# Altium PCB EFR32xG22_ESL-Node_Ref-Des.PcbDoc (part 1 of 3)
Units mm, origin at the board's own origin, x right, y up, seen from the top; angles counter-clockwise.
Board outline 101.83 x 52.07 mm, 2 copper layers (Top, Bottom), stack 0.78 mm thick; 179 components, 91 nets, 473 pads, 1291 vias.
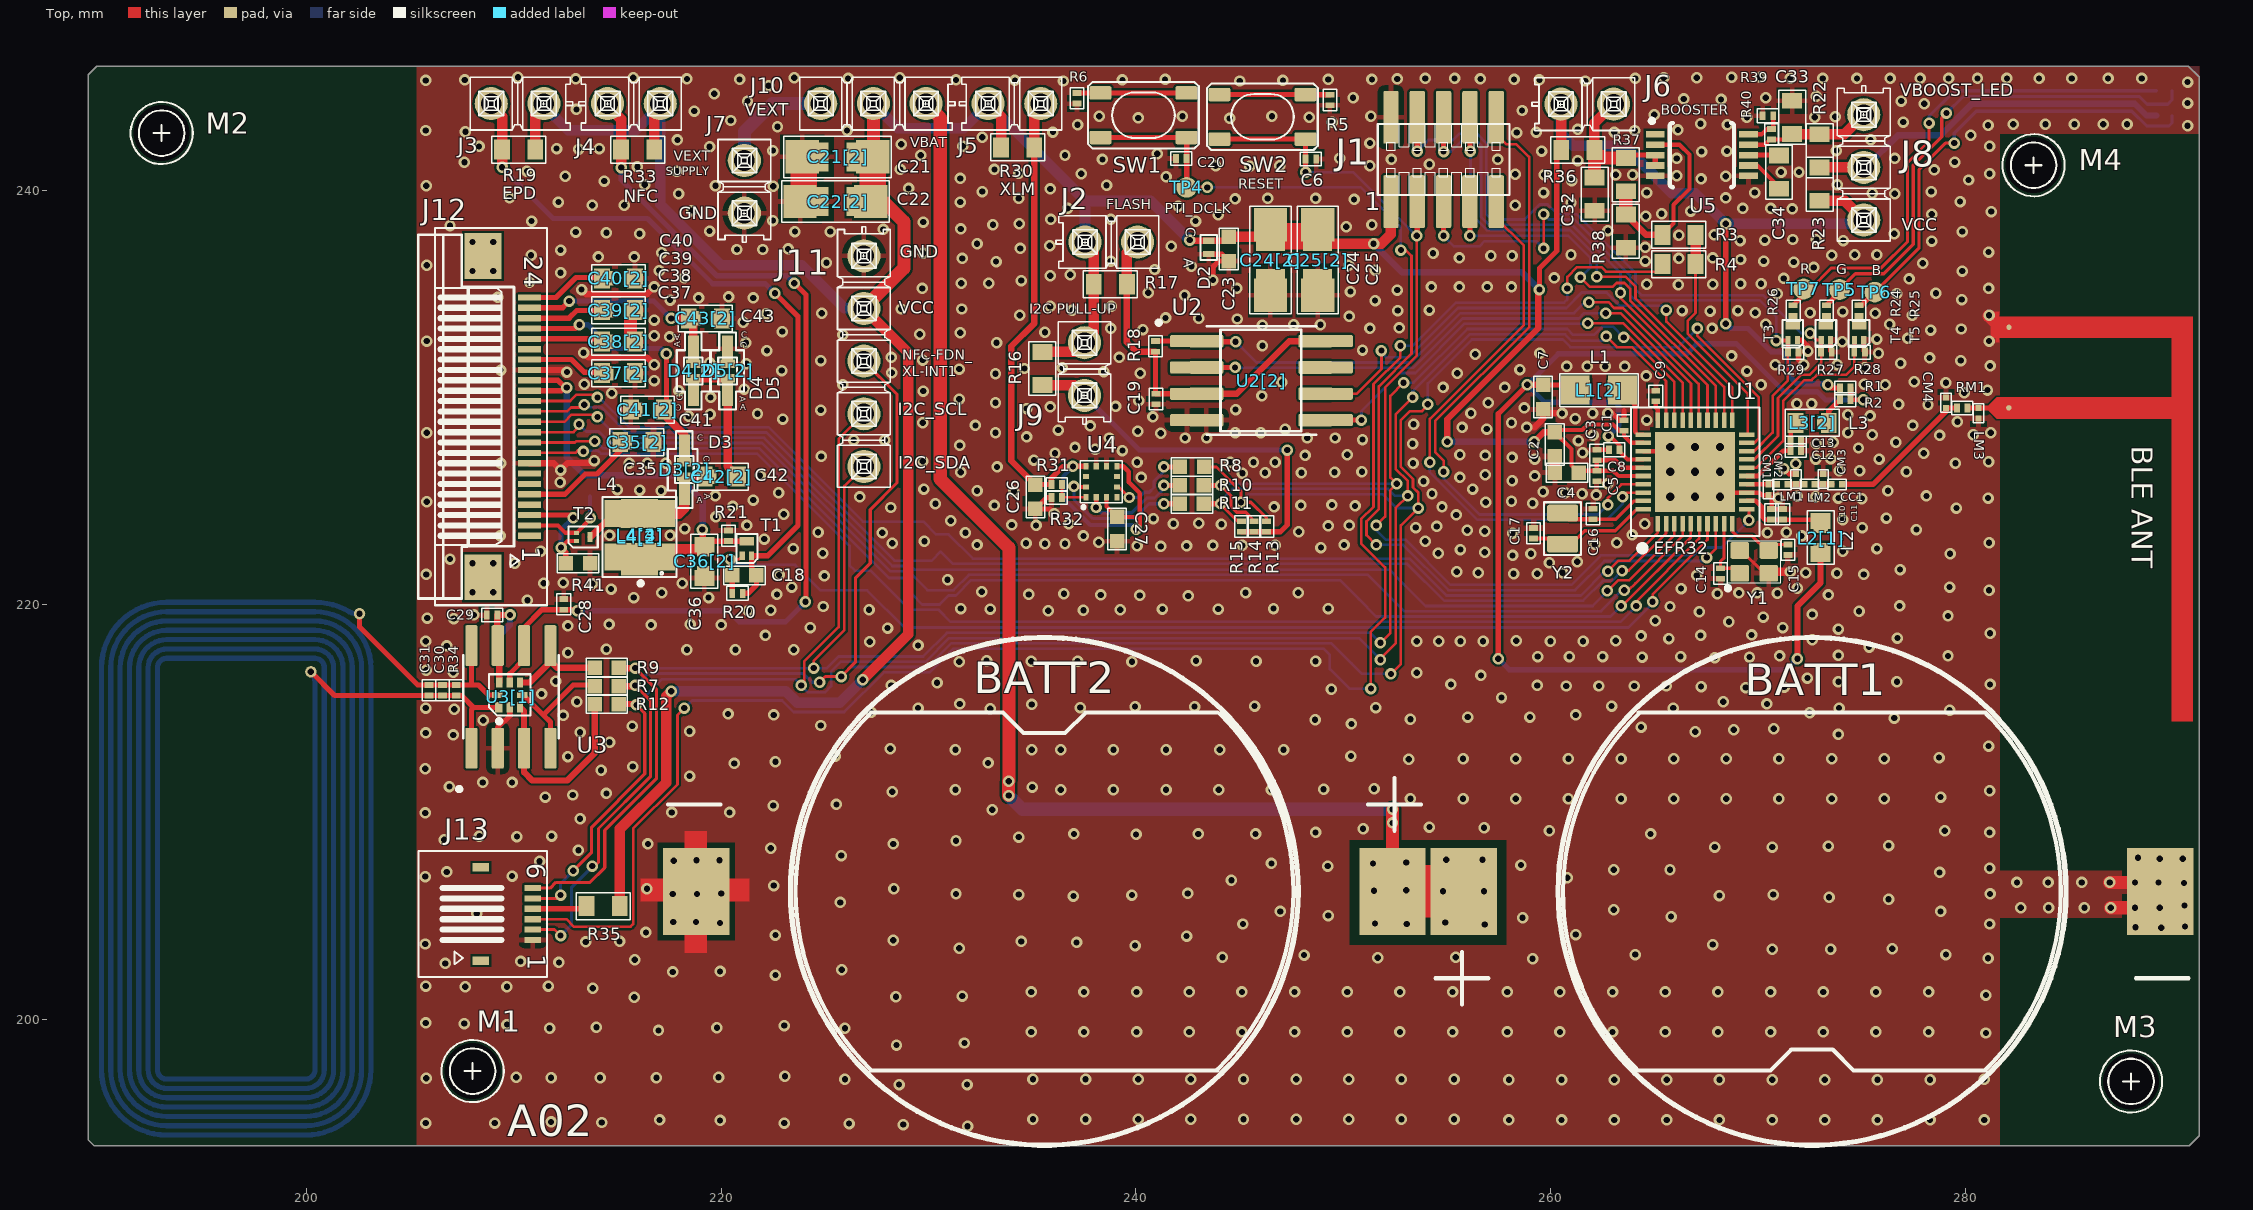
[diagram p0: Top view]
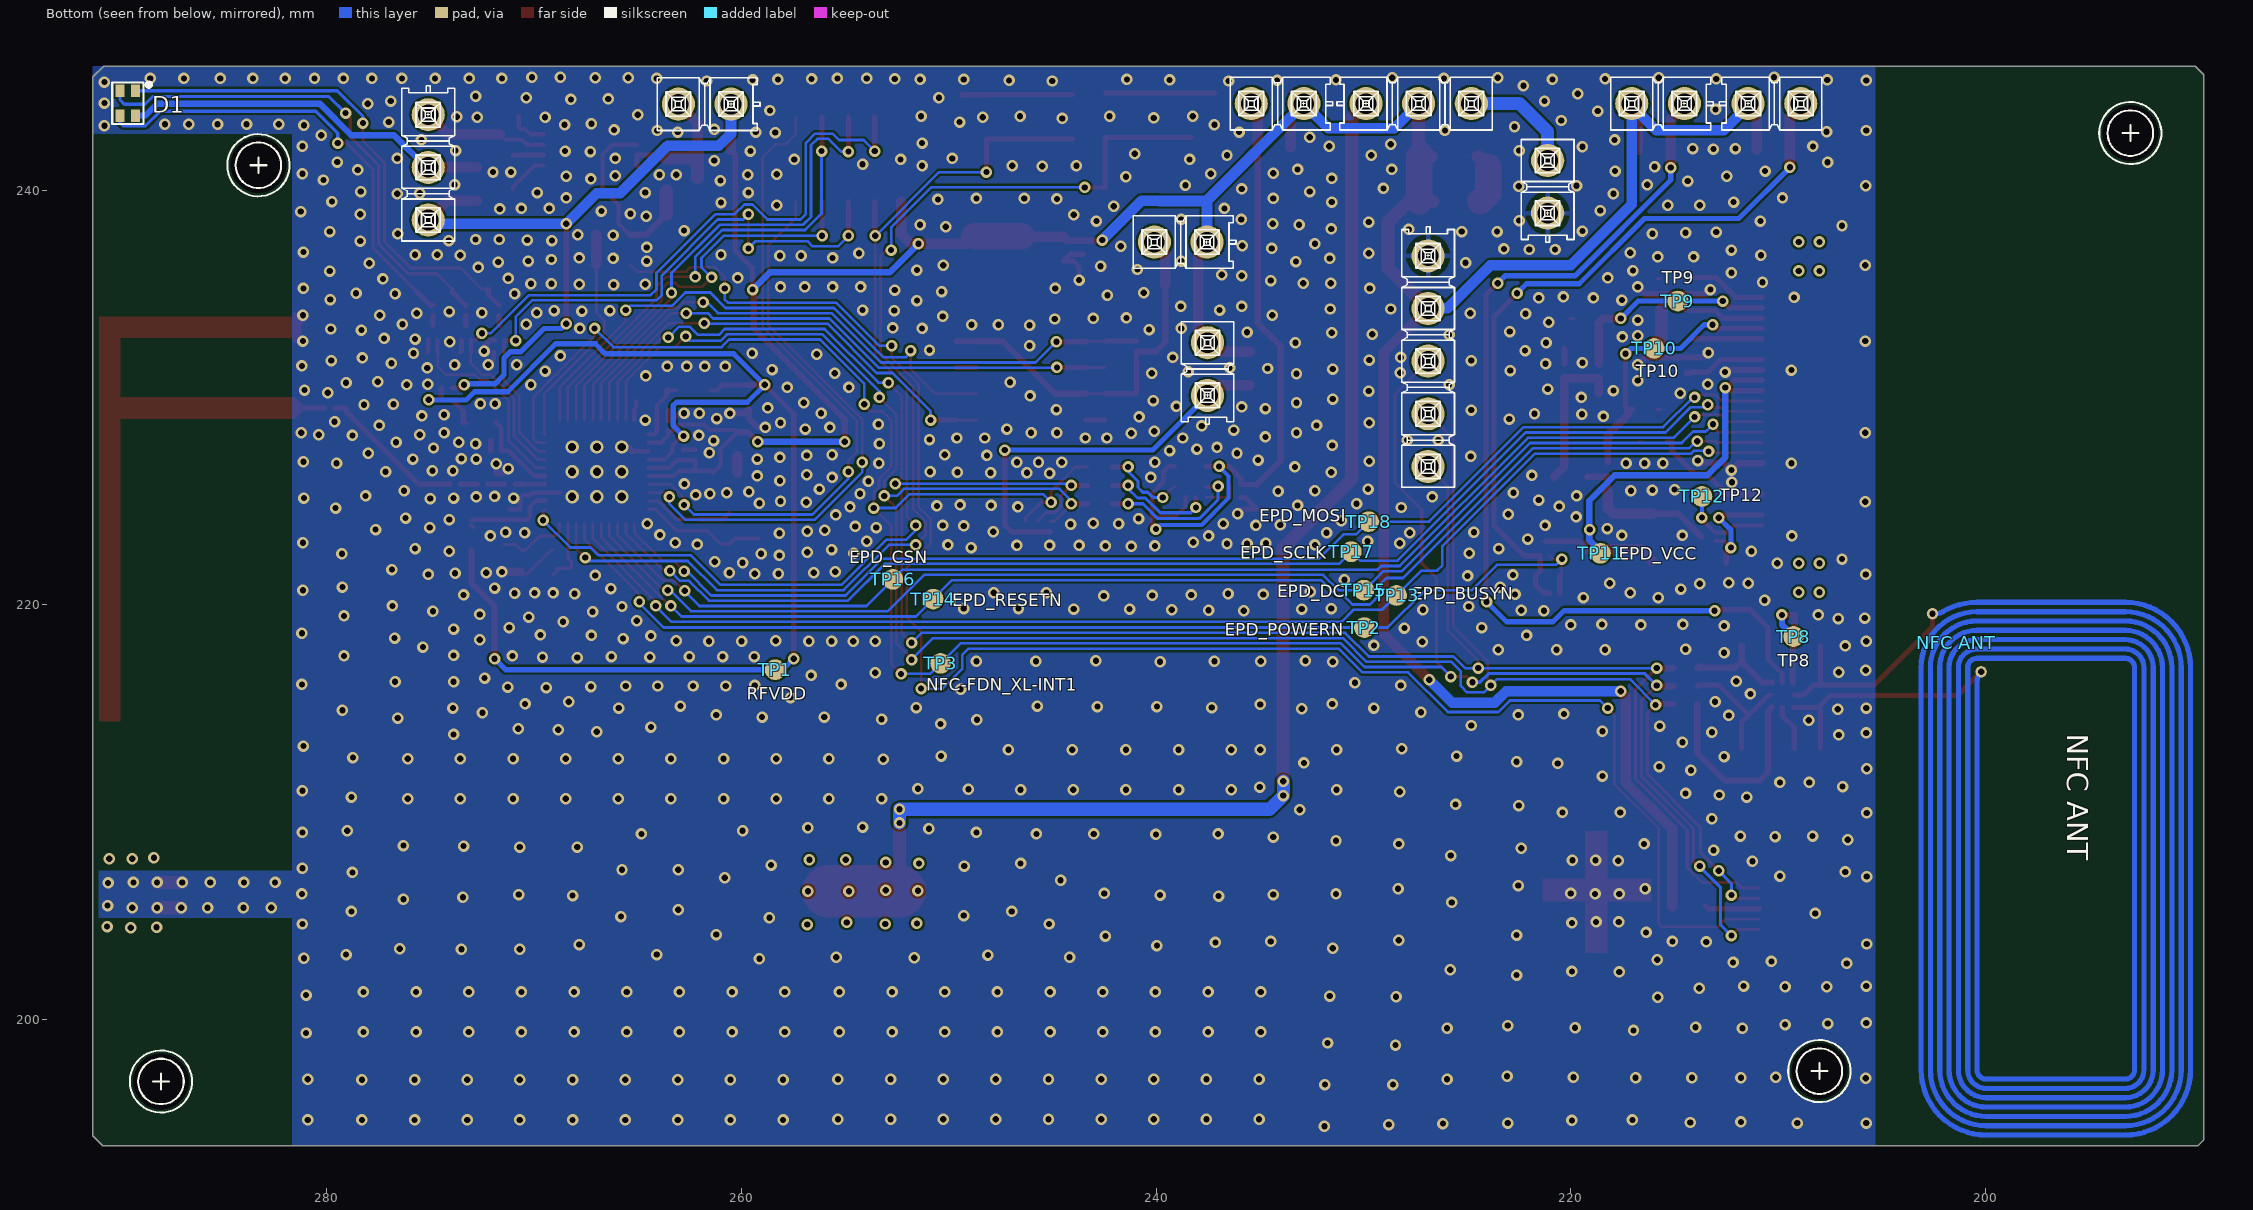
[diagram p1: Bottom view, seen from below]

## Layer stack, top to bottom
Top Solder: solder mask 0.0102, Solder Resist, Dk 3.5
Top: signal copper 0.035
Dielectric 1: core 0.71, FR-4, Dk 4.8
Bottom: signal copper 0.035
Bottom Solder: solder mask 0.0102, Solder Resist, Dk 3.5

## Board outline
189.738,193.904 189.459,194.183 189.459,245.567 189.865,245.974 290.779,245.974 291.287,245.466 291.287,194.386 290.805,193.904

## Design rules (kind name [scope] priority, off if disabled: settings)
Clearance [All] p1: gap=0.1
HoleSize HoleSize_1 [All] p1: absolutevalues=TRUE maxlimit=25.4 minlimit=0.254 maxpercent=80.000 minpercent=20.000
HoleSize [All] p2: absolutevalues=TRUE maxlimit=25.4 minlimit=0.254 maxpercent=80.000 minpercent=20.000
HoleToHoleClearance mdViaViaSameLayer [All] p1 off: gap=0.203 allowstackedmicrovias=TRUE
HoleToHoleClearance [All] p2: gap=0.254 allowstackedmicrovias=TRUE
MinimumSolderMaskSliver [All] p1 off: minsoldermaskwidth=0.254
NetAntennae [All] p1 off: netantennaetolerance=0
PasteMaskExpansion mlMinCreamFrame [All] p1 off: expansion=-0.013
PasteMaskExpansion [All] p2 off: expansion=0
PolygonConnect ThermalVias [IsVia] p1: connectstyle=Direct reliefconductorwidth=0.254 reliefentries=4 polygonreliefangle="90 Angle" airgapwidth=0.254
PolygonConnect [All] p2: connectstyle=Relief reliefconductorwidth=0.254 reliefentries=4 polygonreliefangle="90 Angle" airgapwidth=0.254
RoutingVias [All] p1: holewidth=0.711 width=1.27 viastyle="Through Hole" minholewidth=0.711 minwidth=1.27 maxholewidth=0.711 maxwidth=1.27
ShortCircuit ShortCircuit_1 [InComponent('BLE ANT') or InComponent('NFC ANT')] p1: allowed=TRUE
ShortCircuit [All] p2: allowed=FALSE
SilkToSilkClearance [All] p1 off: silktosilkclearance=0.254
SilkToSolderMaskClearance [IsPad] p1 off: minsilkscreentomaskgap=0.254 clearancetoexposedcopper=TRUE
SolderMaskExpansion mlMinStopFrame [All] p1 off: expansion=0.051
SolderMaskExpansion [All] p2 off: expansion=0.102
Width Width_1 [All] p1: maxlimit=2540 minlimit=0.127 preferedwidth=0.254
Width [All] p2: maxlimit=0.254 minlimit=0.254 preferedwidth=0.254
22 further rules are at their usual default settings.

## Classes and differential pairs
component class EFR32xG22_ESL-Node_Ref-Des_Sheet2: BATT1 BATT2 C21 C21[2] C22 C22[2] C23 C24 C24[2] C25 C25[2] C26 C27 C28 C29 C30 C31 C32 C33 C34 C35 C35[2] C36 C36[2] C37 C37[2] C38 C38[2] C39 C39[2] C40 C40[2] C41 C41[2] C42 C42[2] C43 C43[2] D1 D2 D3 D3[2] D4 D4[2] D5 D5[2] J4 J5 J6 J7 J8 J10 J12 J13 L4 L4[2] L4[3] L4[4] M1 M2 M3 M4 "NFC ANT" R22 R23 R24 R25 R26 R27 R28 R29 R30 R31 R32 R33 R34 R35 R36 R37 R38 R39 R41 T2 T3 T4 T5 TP5 TP6 TP7 TP8 TP9 TP10 TP11 TP12 TP13 TP14 TP15 TP16 TP17 TP18 U3 U3[1] U4 U5 U$18 U$19 U$22 U$23 U$60 U$61 U$62 U$63 U$65 U$66 U$68 U$70 U$71 U$74 U$75 U$77 U$78 U$98
component class EFR32xG22_ESL-Node_Ref-Des_Sheet1: "BLE ANT" C1 C2 C3 C4 C5 C6 C7 C8 C9 C10 C11 C12 C13 C14 C15 C16 C17 C18 C19 C20 CC1 CM1 CM2 CM3 CM4 J1 J2 J3 J9 J11 L1 L1[2] L2 L2[1] L3 L3[2] LM1 LM2 LM3 R1 R2 R3 R4 R5 R6 R7 R8 R9 R18 R21 R22 R23 R36 R37 R38 R39 RM1 SW1 SW2 SW? T1 TP1 TP2 TP3 TP4 TP? U1 U2 U2[2] U$84 U$85 U$89 U$92 U$94 U$95 U$99 U$101 U$109 U$110 U$111 U$112 U$113 U$114 U$115 U$116 U$117 U$119 U$120 U$121 U$123 U$124 U$126 U$128 U$129 U$130 U$131 U$132 U$133 U$134 U$135 U$136 U$138 U$146 U$242 Y1 Y2

## Components (designator, comment, footprint, x,y, rotation, side; value= is the part's Value field where it differs from the comment)
BATT1 "1052TR" BATTERY_HOLDER_CR2450_SMT_1052 272.613,206.172 r0 top
BATT2 "1052TR" BATTERY_HOLDER_CR2450_SMT_1052 235.579,206.172 r180 top
"BLE ANT" "2.4 GHz" RF_ANTENNA_INVERTED_F 282.115,229.49 r270 top (schematic designator ANT)
C1 "" 0201 263.538,228.644 r0 top
C2 "" 0402 260.198,227.736 r0 top
C3 "" 0201 262.23,227.222 r0 top
C4 "" 0402 260.782,226.365 r270 top
C5 "" 0201 262.23,226.206 r180 top
C6 "100nF" 0201 248.436,241.503 r90 top
C7 "" 0402 259.639,230.016 r0 top
C8 "" 0201 263.068,227.476 r90 top
C9 "" 0201 265.074,230.067 r180 top
C10 "15pF" 0201 270.662,224.358 r180 top
C11 "" 0201 271.196,224.358 r0 top
C12 "15pF" 0201 271.831,227.432 r270 top
C13 "" 0201 271.831,227.914 r270 top
C14 "CAP CER 0201 C0G 1.2pF 50V 0.05pF" 0201 268.199,221.507 r180 top
C15 "CAP CER 0201 C0G 1.2pF 50V 0.05pF" 0201 271.45,222.65 r180 top
C16 "CAP CER 0201 C0G 1.2pF 50V 0.05pF" 0201 262.052,224.377 r0 top
C17 "CAP CER 0201 C0G 1.2pF 50V 0.05pF" 0201 259.182,223.444 r0 top
C18 "" 0402 221.107,221.412 r90 top
C19 "100nF" 0201 240.97,229.922 r0 top
C20 "CAP CER 1000PF 10V X7R 0201 10%" 0201 242.188,241.529 r90 top
C21 "N.M." 1206 225.603,241.605 r270 top (schematic designator C21[1])
C21[2] "N.M." 0805 225.603,241.605 r270 top
C22 "N.M." 1206 225.501,239.446 r270 top (schematic designator C22[1])
C22[2] "N.M." 0805 225.603,239.446 r270 top
C23 "" 0402 244.475,237.16 r0 top
C24 "100µF" 1206 246.482,236.626 r0 top (schematic designator C24[1])
C24[2] "" 0805 246.482,236.626 r0 top
C25 "N.M." 1206 248.768,236.626 r0 top (schematic designator C25[1])
C25[2] "100µF" 0805 248.768,236.626 r0 top
C26 "100nF" 0402 235.145,225.204 r0 top
C27 "100nF" 0402 239.09,223.647 r0 top
C28 "" 0201 212.395,220.015 r180 top
C29 "" 0201 208.939,219.507 r270 top
C30 "" 0201 206.55,215.872 r180 top
C31 "CAP CER 0201 C0G 1.2pF 50V 0.05pF" 0201 205.889,215.872 r180 top
C32 "10µF" 0603 262.128,239.801 r0 top
C33 "10µF" 0603 271.653,243.51 r180 top
C34 "0.33uF" 0603 271.018,240.868 r0 top
C35 "1µF" 0603 215.925,227.838 r270 top (schematic designator C35[1])
C35[2] "" 0402 215.925,227.838 r270 top
C36 "10µF" 0603 219.175,222.09 r180 top (schematic designator C36[1])
C36[2] "" 0402 219.175,222.09 r180 top
C37 "" 0603 215.036,231.165 r270 top (schematic designator C37[1])
C37[2] "1µF" 0402 215.036,231.165 r270 top
C38 "1µF" 0603 215.036,232.689 r270 top (schematic designator C38[1])
C38[2] "" 0402 215.036,232.689 r270 top
C39 "1µF" 0603 215.036,234.213 r270 top (schematic designator C39[1])
C39[2] "" 0402 215.036,234.213 r270 top
C40 "1µF" 0603 215.036,235.737 r270 top (schematic designator C40[1])
C40[2] "" 0402 215.036,235.737 r270 top
C41 "1µF" 0603 216.433,229.413 r90 top (schematic designator C41[1])
C41[2] "" 0402 216.433,229.413 r90 top
C42 "4.7µF" 0603 219.994,226.176 r90 top (schematic designator C42[1])
C42[2] "" 0402 219.994,226.176 r90 top
C43 "1µF" 0603 219.227,233.807 r270 top (schematic designator C43[1])
C43[2] "" 0402 219.227,233.807 r270 top
CC1 "CAP CER 0201 NP0 18pF 25V 2%" 0201_300ER 273.812,225.806 r270 top
CM1 "CAP CER 0201 C0G 1.2pF 50V 0.05pF" 0201_300ER 270.51,225.552 r180 top
CM2 "" 0201_300ER 271.831,226.06 r0 top
CM3 "N.M." 0201_300ER 273.152,226.06 r0 top
CM4 "N.M." 0201_300ER 279.07,229.743 r0 top
D1 "ASCB-JTC2-0A308" LED_RGB_PLCC-4 289.6,244.196 r90 bottom
D2 "" SOD882_NXP 243.51,237.236 r270 top
D3 "PMEG3005ELD" SOD-323 218.211,226.517 r0 top (schematic designator D3[1])
D3[2] "" SOD882_FIXED 218.211,226.517 r270 top
D4 "PMEG3005ELD" SOD-323 218.648,231.276 r180 top (schematic designator D4[1])
D4[2] "" SOD882_FIXED 218.648,231.276 r90 top
D5 "PMEG3005ELD" SOD-323 220.299,231.276 r0 top (schematic designator D5[1])
D5[2] "" SOD882_FIXED 220.299,231.276 r270 top
J1 "FTSH-105-01-L-DV-K-TR" FTSH_105_01_L_DV_K 254.838,241.478 r0 top
J2 "75160-101-02LF" Jumper_HDR_2.54mm 237.541,237.49 r0 top
J3 "75160-101-02LF" Jumper_HDR_2.54mm 211.437,244.17 r180 top
J4 "75160-101-02LF" Jumper_HDR_2.54mm 214.511,244.17 r0 top
J5 "75160-101-02LF" Jumper_HDR_2.54mm 232.867,244.17 r0 top
J6 "75160-101-02LF" Jumper_HDR_2.54mm 260.502,244.145 r0 top
J7 "75160-101-02LF" Jumper_HDR_2.54mm 221.107,238.887 r90 top
J8 "75160-101-03LF" Jumper_HDR_2.54mm_3p 275.107,243.637 r270 top
J9 "75160-101-02LF" Jumper_HDR_2.54mm 237.515,230.099 r90 top
J10 "75160-101-03LF" Jumper_HDR_2.54mm_3p 229.87,244.17 r180 top
J11 "MTSW-105-06-S-S-023" Jumper_HDR_2.54mm_5p 226.873,236.83 r270 top
J12 "FH34SRJ-24S-0.5SH" FPC_CONNECTOR_24_0.5MM_PITCH_BOTTOM_CONTACT_ACES_1.3MM_50530 210.396,229.073 r270 top
J13 "FH34SRJ-6S-0.5SH" FH34SRJ-6S-0.5SH 210.499,205.08 r270 top
L1 "2.2µH" 0805 262.331,230.346 r90 top (schematic designator L1[1])
L1[2] "2.2µH" 0603 262.331,230.346 r90 top
L2 "1000Ω @ 100MHz" 0603 273.025,223.241 r0 top (schematic designator L2[2])
L2[1] "1000Ω @ 100MHz" 0402 273.025,223.215 r0 top
L3 "1000Ω @ 100MHz" 0402 272.618,228.771 r90 top (schematic designator L3[1])
L3[2] "1000Ω @ 100MHz" 0603 272.618,228.771 r90 top
L4 "10µH" 0805 216.052,223.249 r0 top (schematic designator L4[1])
L4[2] "10µH" 0806 216.052,223.249 r0 top
L4[3] "10µH" 2520 216.052,223.342 r180 top
L4[4] "10µH" WE-MAPI-3015 216.052,223.342 r90 top
LM1 "" 0201_300ER 271.17,225.806 r270 top
LM2 "IND Fixed 0201 1.5nH 1A 50mOhm 0.05nH" 0201_300ER 272.492,225.806 r270 top
LM3 "" 0201_300ER 280.645,229.235 r0 top
M1 "HOLE_2.2_NPL" HOLE_2.2_NPL 208,197.5 r0 top locked
M2 "HOLE_2.2_NPL" HOLE_2.2_NPL 193,242.75 r0 top locked
M3 "HOLE_2.2_NPL" HOLE_2.2_NPL 288,197 r0 top locked
M4 "HOLE_2.2_NPL" HOLE_2.2_NPL 283.3,241.2 r0 top locked
"NFC ANT" "NFC CUSTOM PCB ANT" NFC_27X14.3_7W_WIDTH0.25MM_SPACE0.2MM_1.5UH_V1_0_NOVIASTOP 196.596,207.264 r180 bottom
R1 "" 0201 274.218,230.454 r90 top
R2 "" 0201 274.218,229.889 r90 top
R3 "0R" 0603 266.192,237.846 r270 top
R4 "N.M." 0603 266.192,236.423 r90 top
R5 "RES 0201 100R 1/20W 1% 200ppm" 0201 249.352,244.348 r180 top
R6 "RES 0201 100R 1/20W 1% 200ppm" 0201 237.16,244.425 r180 top
R7 "0R" 0402 214.47,216.07 r90 top
R8 "0R" 0402 242.697,226.644 r270 top
R9 "0R" 0402 214.47,216.959 r90 top
R10 "0R" 0402 242.696,225.755 r90 top
R11 "0R" 0402 242.696,224.866 r90 top
R12 "0R" 0402 214.47,215.206 r90 top
R13 "" 0201 246.304,223.774 r180 top
R14 "" 0201 245.694,223.774 r180 top
R15 "" 0201 245.085,223.774 r180 top
R16 "0R" 0603 235.483,231.394 r0 top
R17 "0R" 0603 238.76,235.458 r90 top
R18 "RES 0201 330K 1/20W 1%" 0201 240.944,232.461 r180 top
R19 "0R" 0603 210.218,241.953 r270 top
R20 "100k" 0201 220.777,220.548 r270 top
R21 "" 0201 220.347,223.322 r180 top
R22 "N.M." 0603 272.974,241.897 r0 top
R23 "N.M." 0603 272.974,240.284 r180 top
R24 "" 0201 273.304,234.188 r0 top
R25 "" 0201 274.879,234.188 r0 top
R26 "" 0201 271.704,234.188 r0 top
R27 "" 0201 273.304,232.181 r90 top
R28 "" 0201 274.905,232.181 r90 top
R29 "" 0201 271.704,232.181 r90 top
R30 "0R" 0603 234.29,242.062 r90 top
R31 "RES 0201 0R" 0201 236.173,225.802 r270 top
R32 "RES 0201 0R" 0201 236.173,225.167 r270 top
R33 "0R" 0603 215.958,241.953 r270 top
R34 "RES 0201 0R" 0201 207.21,215.872 r180 top
R35 "0 R" 0603 214.3,205.461 r270 top
R36 "0R" 0603 261.315,241.935 r90 top
R37 "N.M." 0603 263.627,240.741 r0 top
R38 "N.M." 0603 263.627,238.023 r0 top
R39 "RES 0201 0R" 0201 270.485,243.586 r270 top
R40 "RES 0201 0R" 0201 270.662,242.697 r180 top
R41 "" 0402 213.081,221.996 r270 top
RM1 "0R" 0201 279.858,229.489 r270 top
SW1 "PTS810SJM250SMTRLFS" SW_CK_PTS810 240.36,243.611 r180 top
SW2 "PTS810SJM250SMTRLFS" SW_CK_PTS810 246.101,243.535 r180 top
T1 "" SOT883_B_FIXED 221.234,222.707 r90 top
T2 "" SOT8026 213.335,223.266 r0 top
T3 "" SOT883_B_FIXED 271.682,233.116 r90 top
T4 "" SOT883_B_FIXED 273.279,233.121 r90 top
T5 "" SOT883_B_FIXED 274.879,233.121 r90 top
TP1 "TPSMDR1" TP_RPAD1#1 258.369,216.865 r180 bottom
TP2 "TPSMDR1" TP_RPAD1#1 229.946,218.897 r180 bottom
TP3 "TPSMDR1" TP_RPAD1#2 250.393,216.51 r180 bottom
TP4 "TPSMDR1" TP_RPAD1#1 242.443,240.132 r90 top
TP5 "TPSMDR1" TP_RPAD1#3 273.939,235.255 r0 top
TP6 "TPSMDR1" TP_RPAD1#4 275.641,234.976 r0 top
TP7 "TPSMDR1" TP_RPAD1#1 272.212,235.229 r0 top
TP8 "TPSMDR1" TP_RPAD1#5 209.245,217.399 r180 bottom
TP9 "TPSMDR1" TP_RPAD1#1 214.828,234.647 r180 bottom
TP10 "TPSMDR1" TP_RPAD1#1 215.971,232.361 r90 bottom
TP11 "TPSMDR1" TP_RPAD1#1 218.562,222.48 r180 bottom
TP12 "TPSMDR1" TP_RPAD1#1 213.665,225.222 r180 bottom
TP13 "TPSMDR1" TP_RPAD1#1 228.397,220.447 r180 bottom
TP14 "TPSMDR1" TP_RPAD1#1 250.749,220.269 r180 bottom
TP15 "TPSMDR1" TP_RPAD1#1 229.972,220.701 r90 bottom
TP16 "TPSMDR1" TP_RPAD1#1 252.692,221.221 r180 bottom
TP17 "TPSMDR1" TP_RPAD1#1 230.581,222.555 r180 bottom
TP18 "TPSMDR1" TP_RPAD1#1 229.743,224.003 r180 bottom
U1 "EFR32XG22" QFN-40_EFR32 266.97,226.407 r90 top
U2 "MX25R8035FZUIL0" SOP8_127P600X175-8N_150MIL 246.024,230.81 r0 top (schematic designator U2[1])
U2[2] "MX25R8035FZUIL0" SOP8_127P790X216-8N_200MIL 246.05,230.81 r0 top
U3 "NT3H2111W0FHKH" XQFN-8 209.788,215.646 r90 top (schematic designator U3[2])
U3[1] "NT3H2111W0FHKH" SO8_SOIC127P600X175-8N 209.847,215.551 r90 top
U4 "BMA400" BMA400 238.332,225.929 r0 top
U5 "MAX1759" UMAX10 267.299,241.689 r270 top
Y1 "DSX211SH 1ZZNAE38400AB0A" XTAL_DSX211SH_4 269.824,222.066 r0 top
Y2 "CM8V-T1A-32.768KHZ-7PF-20PPM-TA-QC" XTAL_DST1610A 260.579,223.672 r270 top

## Footprints (in the part's own frame and the unit in brackets; to place one, negate y for a bottom-side part, rotate by r counter-clockwise, add the part's x,y. Pads: shape width x height; smd on the part's side, far side on the other; paste and mask are expansions set on the pad)
0201 [mm] "0201"
  rect 0.43x0.28 smd: 1(0,-0.255) 2(0,0.255)
  silkscreen extent -0.33,-0.51 0.33,0.51
0201_300ER [mm] "0201_300ER"
  rect 0.3x0.3 smd: 1(0,-0.255) 2(0,0.255)
  silkscreen extent -0.25,-0.45 0.25,0.45
0402 [mm] "0402"
  rect 0.7x0.7 smd: 1(0,-0.585) 2(0,0.585)
  silkscreen extent -0.45,-1 0.45,1
0603 [mil] "0603"
  rect 38x30 smd: 1(0,-31.5) 2(0,31.5)
  silkscreen extent -26,-51 26,51
0805 [mil] "0805"
  rect 55.12x55.12 smd: 1(0,-45) 2(0,45)
0806 [mil] "0806"
  rect 70.87x55.12 smd: 1(0,-45) 2(0,45)
1206 [mil] "1206"
  rect 62.99x62.99 smd: 1(0,-67) 2(0,67)
  silkscreen extent -39,-102 39,102
2520 [mm] "2520"
  rect 2x0.85 smd: 1(0,0.8) 2(0,-0.8)
  silkscreen extent -1.13,1.77 -1,1.89
BATTERY_HOLDER_CR2450_SMT_1052 [mm] "CR2450 Battery Holder"
  rect 3.2x4.2 smd: 1(-16.795,0) 2(16.795,0)
  silkscreen extent -18.16,-12.25 18.16,12.25, body extent -13.46,-8 13.46,7.97, height 4.8
BMA400 [mm]
  rect 0.25x0.3 smd paste+0 mask+0: 1(-0.75,-0.75) 2(-0.25,-0.75) 3(0.25,-0.75) 4(0.75,-0.75) 7(0.75,0.75) 8(0.25,0.75) 9(-0.25,0.75) 10(-0.75,0.75)
  rect 0.3x0.25 smd paste+0 mask+0: 5(0.75,-0.25) 6(0.75,0.25) 11(-0.75,0.25) 12(-0.75,-0.25)
  silkscreen extent -1.02,-1.27 1.02,1.02
FH34SRJ-6S-0.5SH [mm] "Touch Interface Connector, 0.5mm pitch, 6 pins"
  rrect1% 0.3x0.8 smd: 1(1.25,0.4) 2(0.75,0.4) 3(0.25,0.4) 4(-0.25,0.4) 5(-0.75,0.4) 6(-1.25,0.4)
  rect 0.4x0.8 smd: P$5(-2.25,-2.1) P$6(2.25,-2.1)
  silkscreen extent -3.05,-5.12 3.05,1.09
FPC_CONNECTOR_24_0.5MM_PITCH_BOTTOM_CONTACT_ACES_1.3MM_50530 [mm] "FPC_CONNECTOR_24_0.5MM_PITCH_BOTTOM_CONTACT_ACES_1.3MM_50530"
  rrect1% 0.3x1.1 smd: 1(5.75,0.35) 2(5.25,0.35) 3(4.75,0.35) 4(4.25,0.35) 5(3.75,0.35) 6(3.25,0.35) 7(2.75,0.35) 8(2.25,0.35) 9(1.75,0.35) 10(1.25,0.35) 11(0.75,0.35) 12(0.25,0.35) 13(-0.25,0.35) 14(-0.75,0.35) 15(-1.25,0.35) 16(-1.75,0.35) 17(-2.25,0.35) 18(-2.75,0.35) 19(-3.25,0.35) 20(-3.75,0.35) 21(-4.25,0.35) 22(-4.75,0.35) 23(-5.25,0.35) 24(-5.75,0.35)
  rect 2.2x1.8 smd: P$5(-7.75,-1.9) P$6(7.75,-1.9)
  silkscreen extent -9.1,-5.02 9.1,1.19
FTSH_105_01_L_DV_K [mm]
  rrect20% 0.74x2.55 smd mask+0.051: 1(-2.54,-2.035) 2(-2.54,2.035) 3(-1.27,-2.035) 4(-1.27,2.035) 5(0,-2.035) 6(0,2.035) 7(1.27,-2.035) 8(1.27,2.035) 9(2.54,-2.035) 10(2.54,2.035)
  silkscreen extent -3.17,-1.72 3.17,1.72, body extent -3.23,-1.76 3.22,1.77, height 5.56
HOLE_2.2_NPL [mm]
  round 0 hole 2.7 unplated: 1(0,0)
  silkscreen extent -1.5,-1.5 1.5,1.5
Jumper_HDR_2.54mm [mm] "No 3D model for this component"
  round 1.6 hole 1: 1(0,0) 2(2.54,0)
  silkscreen extent -1.4,-1.27 3.55,1.27
Jumper_HDR_2.54mm_3p [mm] "No 3D model for this component"
  round 1.6 hole 1: 1(0,0) 2(2.54,0) 3(5.08,0)
  silkscreen extent -1.4,-1.27 6.09,1.27
Jumper_HDR_2.54mm_5p [mm] "No 3D model for this component"
  round 1.6 hole 1: 1(0,0) 2(2.54,0) 3(5.08,0) 4(7.62,0) 5(10.16,0)
  silkscreen extent -1.4,-1.27 11.17,1.27
LED_RGB_PLCC-4 [mm] "LED_RGB_PLCC-4"
  rect 0.6x0.45 smd: 1(0.6,-0.375) 2(0.6,0.375) 3(-0.6,0.375) 4(-0.6,-0.375)
  silkscreen extent -1,-1.12 1,0.75
NFC_27X14.3_7W_WIDTH0.25MM_SPACE0.2MM_1.5UH_V1_0_NOVIASTOP [mm] "NFC_27X14.3_7W_WIDTH0.25MM_SPACE0.2MM_1.5UH_V1_0_NOVIASTOP"
  round 0.55 hole 0.3: PA(-3.6,9.5) PB(-5.95,12.3)
  Top lines w0.25: -3.6,9.5 ccw(c-3.075,9) -3.8,9 -3.8,-9.7 ccw(c-3.35,-9.7) -3.35,-10.15 3.35,-10.15 ccw(c3.35,-9.7) 3.8,-9.7 3.8,9.7 ccw(c3.35,9.7) 3.35,10.15 -3.8,10.15 ccw(c-3.8,9.7) -4.25,9.7 ; -5.95,12.3 ccw(c-5.844,13.068) -5.45,12.4 cw(c-3.8,9.6) -3.8,12.85 3.35,12.85 cw(c3.35,9.7) 6.5,9.7 6.5,-9.7 cw(c3.35,-9.7) 3.35,-12.85 -3.35,-12.85 cw(c-3.35,-9.7) -6.5,-9.7 -6.5,9.7 cw(c-3.8,9.7) -3.8,12.4 3.35,12.4 cw(c3.35,9.7) 6.05,9.7 6.05,-9.7 cw(c3.35,-9.7) 3.35,-12.4 -3.35,-12.4 cw(c-3.35,-9.7) -6.05,-9.7 -6.05,9.7 cw(c-3.8,9.7) -3.8,11.95 3.35,11.95 cw(c3.35,9.7) 5.6,9.7 5.6,-9.7 cw(c3.35,-9.7) 3.35,-11.95 -3.35,-11.95 cw(c-3.35,-9.7) -5.6,-9.7 -5.6,9.7 ; -4.25,9.7 cw(c-3.8,9.7) -4.25,9.7 ; -4.25,9.7 -4.25,-9.7 ccw(c-3.35,-9.7) -3.35,-10.6 3.35,-10.6 ccw(c3.35,-9.7) 4.25,-9.7 4.25,9.7 ccw(c3.35,9.7) 3.35,10.6 -3.8,10.6 ccw(c-3.8,9.7) -4.7,9.7 -4.7,-9.7 ccw(c-3.35,-9.7) -3.35,-11.05 3.35,-11.05 ccw(c3.35,-9.7) 4.7,-9.7 4.7,9.7 ccw(c3.35,9.7) 3.35,11.05 -3.8,11.05 ccw(c-3.8,9.7) -5.15,9.7 -5.15,-9.7 ccw(c-3.35,-9.7) -3.35,-11.5 3.35,-11.5 ccw(c3.35,-9.7) 5.15,-9.7 5.15,9.7 ccw(c3.35,9.7) 3.35,11.5 -3.8,11.5 ccw(c-3.8,9.7) -5.6,9.7 ; -4.25,9.7 -4.25,9.7 ; -4.25,9.7 -4.25,9.7 ; -4.25,9.7 -4.25,9.7 ; -4.25,9.7 -4.25,9.7 ; -4.25,9.7 -4.25,9.7 ; -4.25,9.7 -4.25,9.7 ; -4.25,9.7 -4.25,9.7 ; -4.25,9.7 -4.25,9.7 ; -4.25,9.7 -4.25,9.7 ; -4.25,9.7 -4.25,9.7 ; -4.25,9.7 -4.25,9.7 ; -4.25,9.7 -4.25,9.7 ; -4.25,9.7 -4.25,9.7 ; -4.25,9.7 -4.25,9.7 ; -4.25,9.7 -4.25,9.7 ; -4.25,9.7 -4.25,9.7 ; -4.25,9.7 -4.25,9.7 ; -4.25,9.7 -4.25,9.7 ; -4.25,9.7 -4.25,9.7 ; -4.25,9.7 -4.25,9.7 ; -4.25,9.7 -4.25,9.7 ; -4.25,9.7 -4.25,9.7 ; -4.25,9.7 -4.25,9.7 ; -4.25,9.7 -4.25,9.7 ; -4.25,9.7 -4.25,9.7 ; -4.25,9.7 -4.25,9.7 ; -4.25,9.7 -4.25,9.7 ; -4.25,9.7 -4.25,9.7 ; -4.25,9.7 -4.25,9.7 ; -4.25,9.7 -4.25,9.7 ; -4.25,9.7 -4.25,9.7 ; -4.25,9.7 -4.25,9.7 ; -4.25,9.7 -4.25,9.7 ; -4.25,9.7 -4.25,9.7 ; -4.25,9.7 -4.25,9.7 ; -4.25,9.7 -4.25,9.7 ; -4.25,9.7 -4.25,9.7 ; -4.25,9.7 -4.25,9.7 ; -4.25,9.7 -4.25,9.7 ; -4.25,9.7 -4.25,9.7 ; -4.25,9.7 -4.25,9.7 ; -4.25,9.7 -4.25,9.7 ; -4.25,9.7 -4.25,9.7 ; -4.25,9.7 -4.25,9.7 ; -4.25,9.7 -4.25,9.7 ; -4.25,9.7 -4.25,9.7 ; -4.25,9.7 -4.25,9.7 ; -4.25,9.7 -4.25,9.7 ; -4.25,9.7 -4.25,9.7 ; -4.25,9.7 -4.25,9.7 ; -4.25,9.7 -4.25,9.7 ; -4.25,9.7 -4.25,9.7 ; -4.25,9.7 -4.25,9.7 ; -4.25,9.7 -4.25,9.7 ; -4.25,9.7 -4.25,9.7 ; -4.25,9.7 -4.25,9.7 ; -4.25,9.7 -4.25,9.7 ; -4.25,9.7 -4.25,9.7 ; -4.25,9.7 -4.25,9.7 ; -4.25,9.7 -4.25,9.7 ; -4.25,9.7 -4.25,9.7 ; -4.25,9.7 -4.25,9.7 ; -4.25,9.7 -4.25,9.7 ; -4.25,9.7 -4.25,9.7 ; -4.25,9.7 -4.25,9.7 ; -4.25,9.7 -4.25,9.7 ; -4.25,9.7 -4.25,9.7 ; -4.25,9.7 -4.25,9.7 ; -5.6,9.7 cw(c-3.8,9.7) -5.6,9.7 ; -5.6,9.7 -5.6,9.7 ; -5.6,9.7 -5.6,9.7 ; -5.6,9.7 -5.6,9.7 ; -5.6,9.7 -5.6,9.7 ; -5.6,9.7 -5.6,9.7 ; -5.6,9.7 -5.6,9.7 ; -5.6,9.7 -5.6,9.7 ; -5.6,9.7 -5.6,9.7 ; -5.6,9.7 -5.6,9.7 ; -5.6,9.7 -5.6,9.7 ; -5.6,9.7 -5.6,9.7 ; -5.6,9.7 -5.6,9.7 ; -5.6,9.7 -5.6,9.7 ; -5.6,9.7 -5.6,9.7 ; -5.6,9.7 -5.6,9.7 ; -5.6,9.7 -5.6,9.7 ; -5.6,9.7 -5.6,9.7 ; -5.6,9.7 -5.6,9.7 ; -5.6,9.7 -5.6,9.7 ; -5.6,9.7 -5.6,9.7 ; -5.6,9.7 -5.6,9.7 ; -5.6,9.7 -5.6,9.7 ; -5.6,9.7 -5.6,9.7 ; -5.6,9.7 -5.6,9.7 ; -5.6,9.7 -5.6,9.7 ; -5.6,9.7 -5.6,9.7 ; -5.6,9.7 -5.6,9.7 ; -5.6,9.7 -5.6,9.7 ; -5.6,9.7 -5.6,9.7 ; -5.6,9.7 -5.6,9.7 ; -5.6,9.7 -5.6,9.7 ; -5.6,9.7 -5.6,9.7 ; -5.6,9.7 -5.6,9.7 ; -5.6,9.7 -5.6,9.7 ; -5.6,9.7 -5.6,9.7 ; -5.6,9.7 -5.6,9.7 ; -5.6,9.7 -5.6,9.7 ; -5.6,9.7 -5.6,9.7 ; -5.6,9.7 -5.6,9.7 ; -5.6,9.7 -5.6,9.7 ; -5.6,9.7 -5.6,9.7 ; -5.6,9.7 -5.6,9.7 ; -5.6,9.7 -5.6,9.7 ; -5.6,9.7 -5.6,9.7 ; -5.6,9.7 -5.6,9.7 ; -5.6,9.7 -5.6,9.7 ; -5.6,9.7 -5.6,9.7 ; -5.6,9.7 -5.6,9.7 ; -5.6,9.7 -5.6,9.7 ; -5.6,9.7 -5.6,9.7 ; -5.6,9.7 -5.6,9.7 ; -5.6,9.7 -5.6,9.7 ; -5.6,9.7 -5.6,9.7 ; -5.6,9.7 -5.6,9.7 ; -5.6,9.7 -5.6,9.7 ; -5.6,9.7 -5.6,9.7 ; -5.6,9.7 -5.6,9.7 ; -5.6,9.7 -5.6,9.7 ; -5.6,9.7 -5.6,9.7 ; -5.6,9.7 -5.6,9.7 ; -5.6,9.7 -5.6,9.7 ; -5.6,9.7 -5.6,9.7 ; -5.6,9.7 -5.6,9.7 ; -5.6,9.7 -5.6,9.7 ; -5.6,9.7 -5.6,9.7 ; -5.6,9.7 -5.6,9.7 ; -5.6,9.7 -5.6,9.7 ; -5.6,9.7 -5.6,9.7
QFN-40_EFR32 [mm] "QFN-40_EFR32"
  rect 0.75x0.22 smd: 1(-2.5,1.8) 2(-2.5,1.4) 3(-2.5,1) 4(-2.5,0.6) 5(-2.5,0.2) 6(-2.5,-0.2) 7(-2.5,-0.6) 8(-2.5,-1) 9(-2.5,-1.4) 10(-2.5,-1.8) 21(2.5,-1.8) 22(2.5,-1.4) 23(2.5,-1) 24(2.5,-0.6) 25(2.5,-0.2) 26(2.5,0.2) 27(2.5,0.6) 28(2.5,1) 29(2.5,1.4) 30(2.5,1.8)
  rect 0.22x0.75 smd: 11(-1.8,-2.5) 12(-1.4,-2.5) 13(-1,-2.5) 14(-0.6,-2.5) 15(-0.2,-2.5) 16(0.2,-2.5) 17(0.6,-2.5) 18(1,-2.5) 19(1.4,-2.5) 20(1.8,-2.5) 31(1.8,2.5) 32(1.4,2.5) 33(1,2.5) 34(0.6,2.5) 35(0.2,2.5) 36(-0.2,2.5) 37(-0.6,2.5) 38(-1,2.5) 39(-1.4,2.5) 40(-1.8,2.5)
  rect 3.85x3.85 smd: EGP(0,0)
  silkscreen extent -3.83,-3.1 3.1,3.1
RF_ANTENNA_INVERTED_F [mil] "RF_ANTENNA_INVERTED"
  round 10 smd paste-10 mask-10: 1(-0.31,-0.39) 2(-153.31,-0.26)
  Top region: -172.99,349.09 594.72,349.09 594.72,308.96 20.01,308.96 20.01,-18.11 -19.99,-18.11 -19.99,308.96 -132.99,308.96 -132.99,-18.11 -152.99,-18.11 -172.99,-18.11
SO8_SOIC127P600X175-8N [mm]
  rrect25% 1.97x0.59 smd: 1(-2.475,1.905) 2(-2.475,0.635) 3(-2.475,-0.635) 4(-2.475,-1.905) 5(2.475,-1.905) 6(2.475,-0.635) 7(2.475,0.635) 8(2.475,1.905)
  silkscreen extent -4.54,-2.3 2,2.59
SOD882_FIXED [mm] "SOD882_FIXED"
  rect 0.4x0.7 smd: A(0.35,0) C(-0.35,0)
  silkscreen extent -0.65,-0.45 0.65,0.45
SOD882_NXP [mm] "SOD882_NXP"
  rect 0.3x0.55 smd: A(0.325,0) C(-0.325,0)
  silkscreen extent -0.6,-0.4 0.6,0.4
SOD-323 [mm] "SOD-323"
  rect 0.53x1.25 smd: A(0,-1.075) C(0,1.075)
  silkscreen extent -0.8,-1.85 0.64,1.85
SOP8_127P600X175-8N_150MIL [mm]
  rrect25% 1.65x0.61 smd: 1(-2.635,1.905) 2(-2.635,0.635) 3(-2.635,-0.635) 4(-2.635,-1.905) 5(2.635,-1.905) 6(2.635,-0.635) 7(2.635,0.635) 8(2.635,1.905)
  silkscreen extent -1.95,-2.45 1.95,2.45
SOP8_127P790X216-8N_200MIL [mm]
  rrect25% 1.65x0.58 smd: 1(-3.585,1.905) 2(-3.585,0.635) 3(-3.585,-0.635) 4(-3.585,-1.905) 5(3.585,-1.905) 6(3.585,-0.635) 7(3.585,0.635) 8(3.585,1.905)
  silkscreen extent -5.05,-2.62 2.65,2.89
SOT883_B_FIXED [mm] "SOT883_B_FIXED"
  rect 0.4x0.7 smd: D(0.35,0)
  rect 0.4x0.25 smd: G(-0.35,0.225) S(-0.35,-0.225)
  silkscreen extent -0.7,-0.5 0.7,0.5
SOT8026 [mm] "SOT8026"
  rect 0.25x0.5 smd: D(0.325,0)
  rect 0.25x0.2 smd: G(-0.325,0.2) S(-0.325,-0.2)
  silkscreen extent -0.7,-0.5 0.7,0.5
SW_CK_PTS810 [mm] "Switch, C&K, PTS810"
  rrect20% 1.05x0.65 smd: 1(-2.075,1.075) 2(2.075,1.075) 3(-2.075,-1.075) 4(2.075,-1.075)
  silkscreen extent -2.67,-1.6 2.67,1.6, body extent -2.1,-1.63 2.1,1.63, height 2.6
TP_RPAD1#1 [mm] "TP_RPAD1"
  rrect100% 1x1 smd: P$1(0,0)
TP_RPAD1#2 [mm] "TP_RPAD1"
  rrect100% 1x1 smd: P$1(0,0.66)
TP_RPAD1#3 [mm] "TP_RPAD1"
  rrect100% 1x1 smd: P$1(0,-0.051)
TP_RPAD1#4 [mm] "TP_RPAD1"
  rrect100% 1x1 smd: P$1(0,0.101)
TP_RPAD1#5 [mm] "TP_RPAD1"
  rrect100% 1x1 smd: P$1(0,1.067)
UMAX10 [mm]
  rect 0.32x0.9 smd: 1(-1,-2.25) 2(-0.5,-2.25) 3(0,-2.25) 4(0.5,-2.25) 5(1,-2.25) 6(1,2.25) 7(0.5,2.25) 8(0,2.25) 9(-0.5,2.25) 10(-1,2.25)
  silkscreen extent -1.75,-2.51 1.55,1.55
WE-MAPI-3015 [mm] "WE-MAPI-3015"
  rect 1.3x3.4 smd: 1(-1.05,0) 2(1.05,0)
  silkscreen extent -2.41,-1.78 1.85,1.78
XQFN-8 [mm] "XQFN-8"
  rect 0.5x0.37 smd: 1(-0.6,0.535)
  rect 0.5x0.3 smd: 2(-0.6,0) 3(-0.6,-0.5) 5(0.6,-0.5) 6(0.6,0) 7(0.6,0.5)
  rect 0.3x0.5 smd: 4(0,-0.6) 8(0,0.6)
  Top pour cut-out: -0.254,0.254 -0.254,-0.254 0.254,-0.254 0.254,0.254
  silkscreen extent -1.37,-1 1,1
XTAL_DST1610A [mm] "Crystal KDS DST1610A (2 pin) (190827)"
  rrect25% 0.8x1.5 smd mask+0.051: 1(-0.75,0) 2(0.75,0)
  silkscreen extent -1.27,-0.89 1.27,0.89, body extent -1.02,-0.5 1.02,0.5, height 0.45
XTAL_DSX211SH_4 [mm] "X_SSS_DSX211SH_2.05X1.65-4"
  rrect20% 0.9x0.8 smd mask+0.051: 1(-0.7,-0.55) 2(0.7,-0.55) 3(0.7,0.55) 4(-0.7,0.55)
  silkscreen extent -1.37,-1.37 1.27,1.02, body extent -1.07,-0.87 1.07,0.87, height 0.5

## Part data
BATT1 BATT2: "Battery Holder _Open_ Coin, 24.5mm 1 Cell SMD _SMT_ Tab"
"BLE ANT": library part ANT_INVERTED_F
C1 C6 C8 C19: library part CMP-06035-000062-2, "Chip Multilayer Ceramic Capacitors for General Purpose, 0201, 0.10uF, X5R, 15%, 10%, 6.3V"
C2: library part CMP-120-00104-A.01, "CAP CER 0402 X5R 10uF 10V 20%"
C3: library part CMP-120-00000-A.11, "CAP CER 0201 X7R 10nF 10V 10%"
C4: library part CMP-120-00029-A.01, "CAP CER 0402 X7R 1uF 6.3V 10%"
C5 C9: library part CMP-120-00040-A.03, "CAP CER 0201 X6S 1uF 10V 20%"
C7: library part CMP-2008-04549-2, "Chip Multilayer Ceramic Capacitors for General Purpose, 0402, 4.7uF, X5R, 15%, 20%, 6.3V"
C10 C12: library part CMP-2010-01505-2, "Chip Multilayer Ceramic Capacitors for General Purpose, 0201, 15pF, C0G, 30ppm/°C, 5%, 50V"
C11 C13 C29: library part CMP-120-00038-A.01, "CAP CER 1000PF 10V X7R 0201 10%"
C14 C15 C16 C17 C31 CM1: library part CMP-120-00031-A.02
C18: library part CMP-2000-06336-1, "Chip Capacitor, 1 uF, +/- 10%, 10 V, -55 to 85 degC, 0603 (1608 Metric), RoHS, Tape and Reel"
C20: library part CMP-120-00038-A.01
C21 C21[2] C22 C22[2]: library part CMP-1662-00011-2, "Chip Capacitor, 100 uF, +/- 20%, 6.3 V, -55 to 85 degC, 1206 (3216 Metric), RoHS, Tape and Reel"
C23 C26 C27: library part CMP-2008-03712-2, "Ceramic Capacitor for Automotive 100nF ±10% 16VDC X7R 0402 Paper T/R"
C24 C24[2] C25 C25[2]: library part CMP-06035-063005-1, "CAP CER 100UF 6.3V X5R 1206"
C28: library part CMP-2010-01264-2, "Chip Multilayer Ceramic Capacitors for General Purpose, 0201, 0.10uF, X5R, 15%, 10%, 10V"
C30: library part CMP-2010-01602-2, "Chip Multilayer Ceramic Capacitors for General Purpose, 0201, 7.5pF, C0G, 30ppm/°C, 0.1pF, 50V"
C32 C33: library part CMP-2006-02520-2, "Chip Multilayer Ceramic Capacitors for General Purpose, 0603, 10uF, X5R, 15%, 20%, 25V"
C34: library part CMP-2006-02359-2, "Ceramic Capacitor for Automotive 330nF  ±10% 16VDC X7R 0603 Paper T/R"
C35 C35[2] C37 C37[2] C38 C38[2] C39 C39[2] C40 C40[2]: library part CMP-2006-02363-3, "Ceramic Capacitor for Automotive 1uF  ±10% 25VDC X7R 0603 Paper T/R"
C36 C36[2] C41 C41[2] C42 C42[2] C43 C43[2]: library part CMP-2000-05448-2, "CAP CER 10UF 10V X5R 0603"
CC1: library part CMP-120-00037-A.02
CM2: library part CMP-120-00033-A.02, "CAP CER 0201 C0G 1.3pF 25V 0.05pF"
CM3 CM4: library part CMP-1033-00061-2
D1: "Standard LEDs - SMD 1615 Tricolor PLCC-4 LED"
D2: library part ESD7551N2T5G, "ESD Suppressors / TVS Diodes BI-DIRECTIONAL 5V ESD PR"
D3 D3[2] D4 D4[2] D5 D5[2]: library part PMEG3005ELD_315, "Schottky Diodes & Rectifiers Schottky Diode"
J1: library part CMP-2000-06293-2, "CONN HEADER SMD 10POS 1.27MM"
J2 J3 J4 J5 J6 J7 J9: library part HTSW-102-28-F-S, "HEADER, 2.54MM, VERTICAL THOUGH HOLE, 2 POSITION; Connector Systems:Board-to-Board; Pitch Spacing:2.54mm; No. of Rows:1Rows; No. of Contacts:2Contacts; Contact Termination Type:Through Hole; Product Range:HTSW Series; Gender:Header RoHS Compliant: Yes"
J8 J10: "BergStik®, Board to Board connector, Unshrouded vertical header, through hole, single Row,3 position, 2.54mm pitch"
J12: library part CMP-11609-000022-1, "CONN FPC/FFC 24POS .5MM"
J13: library part FH34SRJ-6S-0.5SH(50)
L1 L1[2]: library part CMP-06042-016317-1, "Multilayer Type Inductor for Power Lines, 0805 (2012), 2.2µH, 30%, 0.288O, 0.8A"
L2 L2[1] L3 L3[2]: library part CMP-0686-00457-3, "Chip Ferrite Bead, 0603, 1000O @ 100MHz, 0.5O, 25%, 450mA"
L4 L4[2] L4[3] L4[4]: library part CMP-14484-000285-1, "SMD Inductors 10uH ±10% 0.52A 0.65O 0806"
LM1: library part CMP-155-00023-A.03, "IND FIXED 0201 2.6nH 600mA 0.12Ohm ±0.1nH"
LM2: library part CMP-155-00007-A.02
LM3: library part CMP-155-00007-A.02, "IND Fixed 0201 1.5nH 1A 50mOhm 0.05nH"
"NFC ANT": library part NFC_ANTENNA_custom, "Custom NFC Printed Antenna"
R1 R2 R3 R4 R16 R17 R19 R22 R23 R30 R33 R35 R36 R37 R38 RM1: library part CMP-1012-00001-2
R5 R6: library part CMP-180-00121-A.01
R7 R8 R9 R10 R11 R12: library part CMP-2002-08060-1
R13 R14 R15: library part CMP-1010-00090-1, "4K7 0.05W 5% 0201 (0603 Metric)  SMD"
R18: library part CMP-180-00036-A.02
R20 R27 R28 R29: library part CMP-1010-00642-1, "100K 0.05W 1% 0201 (0603 Metric)  SMD"
R21: library part CMP-03412-037826-1, "RES SMD 10K OHM 5% 1/20W 0201"
R24 R25: library part CMP-180-00121-A.01, "RES 0201 100R 1/20W 1% 200ppm"
R26: library part CMP-1010-00059-1, "240R 0.05W 5% 0201 (0603 Metric)  SMD"
R31 R32 R34 R39 R40: library part CMP-180-00011-A.05
R41: library part CMP-2002-01737-1
SW1 SW2: library part CMP-10040-000001-2, "SWITCH TACTILE SPST-NO 0.05A 16V"
T1: library part PMZ350UPEYL, "P-Channel 20V 1A (Ta) 360mW (Ta), 3.125W (Tc) Surface Mount DFN1006-3"
T2: library part PMCB60XNZ, "MOSFET PMCB60XN - 30 V, N-channel Trench MOSFET"
T3 T4 T5: library part PMZB290UNE, "N-Channel 20V 1.2A (Ta) 350mW (Ta), 5.43W (Tc) Surface Mount DFN1006B-3"
TP1 TP2 TP3 TP4 TP5 TP6 TP7 TP8 TP9 TP10 TP11 TP12 TP13 TP14 TP15 TP16 TP17 TP18: "Testpoint"
U1: "IC RF SoC 2G4+SUBG 32bit 1024kB FLASH QFN40"
U2 U2[2]: library part CMP-150-00010-A.07, "IC FLASH 8MBIT SPI/QUAD USON"
U3 U3[1]: library part CMP-10079-000001-1, "IC RFID TRANSP 13.56MHZ 8XQFN"
U4: library part CMP-191065-000001-1, "ACCELEROMETER 2-16G 12LGA"
U5: library part CMP-0246-00630-1, "Buck/Boost Regulating Charge Pump, open-drain POK, 10-Pin uMAX, -40°C to +85°C, Pb-Free"
Y1: library part XTAL-1-3-4P, "CRYSTAL 2.0X1.6mm 38.4MHz 10pF 20ppm"
Y2: library part XTAL-2P, "CRYSTAL 2.0x1.2mm 32.768kHz 7pF 20ppm"

## Via types
v1: diameter 0.554/0.554 (per signal layer), hole 0.3, Top to Bottom, tented both sides, 1282 vias
v2: diameter 0.65, hole 0.4, Top to Bottom, 9 vias

## Nets (pads, with @x,y where several pads share a name; then routed paths per layer and width w, separated by ;. In a path a pad name is that pad's centre, name@x,y a point inside that pad or via, vN(x,y) a via of type N, cw(c..) or ccw(c..) an arc to the next point about the centre after c; other vN are vias at no path point)
BMA_INT: R8.1 U4.5 | length 4.1
  Top w0.152: U4.5@239.082,225.679 239.166,225.679 v1(239.674,225.171)
  Top w0.254: v1(241.35,226.644) R8.1@242.112,226.644
  Bottom w0.152: v1(239.674,225.171) 239.682,225.178 240.15,225.178 240.396,225.425 240.64,225.425 240.87,225.655 240.87,225.954 241.35,226.434 v1(241.35,226.644)
BMA_SCL: R11.2 U4.12 | length 7
  Top w0.203: v1(237.007,225.704) 237.033,225.679 U4.12@237.582,225.679
  Top w0.254: v1(241.35,224.866) R11.2@242.111,224.866
  Bottom w0.152: v1(237.007,225.704) 237.007,225.069 237.922,224.155 239.916,224.155 240.628,224.866 v1(241.35,224.866)
BMA_SDA: R10.2 U4.2 | length 5.3
  Top w0.203: v1(238.074,224.688) 238.082,224.696 U4.2@238.082,225.179
  Top w0.254: v1(241.35,225.755) R10.2@242.111,225.755
  Bottom w0.152: v1(238.074,224.688) 238.328,224.434 239.801,224.434 240.512,225.146 240.894,225.146 241.35,225.602 v1(241.35,225.755)
BTN/PTI_DCLK: C20.1 SW1.1 SW1.2 TP4.P$1 U1.8 | length 53.8
  Top w0.127: v1(251.587,222.885) 251.12,223.352 251.12,224.018 251.713,224.612 251.713,230.534 253.289,232.11 253.289,236.83 253.009,237.109 v1(252.781,237.109) ; v1(267.538,222.275) 267.97,222.707 U1.8@267.97,223.907
  Top w0.203: TP4.P$1@242.443,240.132 v1(243.434,240.132)
  Top w0.254: SW1.2@238.285,242.536 SW1.1@242.435,242.536 242.443,242.529 C20.1@242.443,241.529 TP4.P$1@242.443,240.132
  Bottom w0.127: v1(243.434,240.132) 250.847,240.132 252.781,238.198 v1(252.781,237.109) ; v1@251.629,222.843 v1(251.587,222.885) 252.89,222.885 255.074,220.701 261.187,220.701 262.595,222.108 267.371,222.108 v1(267.538,222.275)
DBG_SWCLK: J1.8 U1.22 | length 22.9
  Top w0.127: v1(262.23,235.814) 263.631,235.814 264.094,235.35 264.094,234.781 268.37,230.505 U1.22@268.37,228.907
  Top w0.254: J1.8@256.108,243.513 256.108,241.91 v1(256.134,241.884)
  Bottom w0.127: v1(256.134,241.884) 256.134,238.862 256.921,238.074 260.938,238.074 262.23,236.782 v1(262.23,235.814)
DBG_SWDIO: J1.7 U1.23 | length 19.9
  Top w0.127: v1(261.442,235.788) 261.884,235.346 263.006,235.346 263.179,235.519 263.566,235.519 263.84,235.245 263.84,234.676 267.97,230.545 U1.23@267.97,228.907
  Top w0.254: v1(256.108,237.795) J1.7@256.108,239.443
  Bottom w0.127: v1(256.108,237.795) 260.858,237.795 261.924,236.728 261.924,236.27 v1(261.442,235.788)
DBG_SWO: J1.6 U1.24 | length 24
  Top w0.127: v1(263.373,235.052) 263.373,234.784 267.57,230.586 U1.24@267.57,228.907
  Top w0.254: v1(254.838,241.859) J1.6@254.838,243.513
  Bottom w0.127: v1(254.838,241.859) 255.194,241.859 255.803,242.468 256.337,242.468 256.642,242.164 256.642,238.713 257.026,238.328 261.043,238.328 263.373,235.999 v1(263.373,235.052)
EPD_BUSYN: J12.9 TP13.P$1 U1.6 | length 63
  Top w0.127: J12.9@210.746,227.323 212.956,227.323 213.09,227.457 213.151,227.396 v1(213.345,227.396) ; v1(264.135,219.939) 264.135,220.11 264.109,220.135 267.17,223.196 U1.6@267.17,223.907
  Bottom w0.127: v1(213.345,227.396) 213.368,227.418 214.057,227.418 214.186,227.289 221.728,227.289 226.187,222.831 226.187,221.894 226.441,221.64 227.203,221.64 TP13.P$1@228.397,220.447 229.087,219.756 230.484,219.756 231.064,219.177 263.373,219.177 v1(264.135,219.939)
EPD_CSN: J12.12 TP16.P$1 U1.3 | length 61.4
  Top w0.127: J12.12@210.746,228.823 212.422,228.823 212.768,229.169 213.909,229.169 v1(214.02,229.057) 214.02,229.179 v1@214.005,229.194 ; v1(262.738,220.675) 262.763,220.675 263.261,221.173 263.775,221.173 265.97,223.368 U1.3@265.97,223.907
  Bottom w0.127: v1@214.02,229.108 v1(214.02,229.057) 215.026,228.051 ; 215.027,228.052 222.065,228.052 228.248,221.869 229.133,221.869 229.31,221.691 252.222,221.691 TP16.P$1@252.692,221.221 253.975,219.939 262.026,219.939 262.738,220.65 v1(262.738,220.675)
EPD_DC: J12.11 TP15.P$1 U1.4 | length 62.3
  Top w0.127: J12.11@210.746,228.323 212.866,228.323 213.157,228.613 213.131,228.639 v1(213.131,228.702) ; v1(263.55,220.701) 263.76,220.701 264.09,221.031 266.37,223.311 U1.4@266.37,223.907
  Bottom w0.127: v1(213.131,228.702) 213.477,228.356 214.087,228.356 214.646,227.797 218.548,227.797 ; 218.549,227.798 221.96,227.798 228.143,221.615 229.027,221.615 229.942,220.701 TP15.P$1@229.972,220.701 231.204,220.701 231.941,221.437 251.181,221.437 252.933,219.685 262.434,219.685 263.45,220.701 v1(263.55,220.701)
EPD_MOSI: J12.14 TP18.P$1 U1.1 | length 60.4
  Top w0.127: J12.14@210.746,229.823 212.703,229.823 213.015,230.134 213.524,230.134 213.808,230.134 213.883,230.134 v1(214.02,229.997) ; v1(262.763,221.615) 262.763,221.565 262.738,221.59 263.27,222.123 263.811,222.123 265.17,223.482 U1.1@265.17,223.907
  Bottom w0.127: v1(214.02,229.997) 214.101,229.997 215.538,228.56 222.275,228.56 226.833,224.003 TP18.P$1@229.743,224.003 230.353,223.393 230.962,223.393 232.131,222.225 253.191,222.225 254.969,220.447 261.464,220.447 262.632,221.615 v1(262.763,221.615)
EPD_POWERN: C18.2 R20.1 T1.G TP2.P$1 U1.7 | length 53.6
  Top w0.127: C18.2@220.421,221.513 v1(220.421,222.199) 220.851,222.199 T1.G@221.009,222.357 ; v1(264.922,220.142) 264.922,220.491 267.57,223.139 U1.7@267.57,223.907
  Top w0.152: C18.2@220.421,221.513 C18.2@220.522,221.412
  Top w0.254: R20.1@220.522,220.548 C18.2@220.522,221.412
  Bottom w0.127: v1(220.421,222.199) 220.701,221.92 223.56,221.92 224.79,220.69 227.036,220.69 228.829,218.897 TP2.P$1@229.946,218.897 263.754,218.897 264.922,220.065 v1(264.922,220.142)
EPD_RESETN: J12.10 TP14.P$1 U1.5 | length 63
  Top w0.127: J12.10@210.746,227.823 212.938,227.823 213.004,227.889 v1(213.893,227.889) ; v1(263.398,219.939) 263.455,219.939 266.77,223.254 U1.5@266.77,223.907
  Bottom w0.127: v1(213.893,227.889) 213.945,227.889 214.291,227.543 221.833,227.543 228.092,221.285 228.876,221.285 229.184,220.976 229.184,220.511 229.686,220.01 230.526,220.01 230.962,220.447 231.309,220.447 232.046,221.183 249.834,221.183 TP14.P$1@250.749,220.269 251.587,219.431 262.89,219.431 v1(263.398,219.939)
EPD_SCLK: J12.13 TP17.P$1 U1.2 | length 61.1
  Top w0.127: J12.13@210.746,229.323 212.562,229.323 212.754,229.514 213.36,229.514 213.385,229.54 v1(213.385,229.641) ; v1(263.449,221.64) 263.77,221.64 265.57,223.441 U1.2@265.57,223.907
  Bottom w0.127: v1(213.385,229.641) 213.502,229.525 214.214,229.525 215.433,228.306 222.17,228.306 228.353,222.123 230.149,222.123 TP17.P$1@230.581,222.555 231.165,221.971 253.086,221.971 254.864,220.193 261.569,220.193 262.524,221.148 262.957,221.148 v1(263.449,221.64)
EPD_VCC: C36.1 C36[2].1 J12.15 J12.16 L4.1 L4[2].1 L4[3].1 L4[4].1 R21.2 T1.D TP11.P$1 | length 24
  Top w0.254: J12.15@210.746,230.323 212.271,230.323 212.421,230.473 212.472,230.473 212.121,230.823 J12.16@210.746,230.823 ; C36[2].1@219.175,222.675 219.567,223.067 R21.2@220.347,223.067 221.225,223.067 T1.D@221.234,223.057 ; C36.1@219.175,222.89 C36.1@219.179,222.885
  Top w0.305: v1@212.472,230.473 v1(212.543,230.473) ; v1@219.1,223.749 219.1,223.114 C36.1@219.175,223.039 ; C36.1@219.175,222.89 C36.1@219.175,223.039 ; C36.1@219.175,223.057 C36.1@219.175,223.039 ; C36.1@219.177,222.891 219.177,223.037 C36.1@219.175,223.039
  Top w0.406: C36[2].1@219.175,222.675 C36.1@219.175,222.89
  Top w0.508: L4.1@216.052,222.106 216.621,222.675 C36[2].1@219.175,222.675
  Bottom w0.305: v1(212.543,230.473) 212.539,230.469 212.539,227.103 213.403,226.24 217.879,226.24 219.1,225.019 219.1,223.12 TP11.P$1@218.588,222.607
  other v1: 219.075,223.622
FIELD_DETECT: R7.2 U3.4 U3[1].4 | length 6.3
  Top w0.25: U3.4@210.388,215.646 210.445,215.646 211.407,214.684 ; U3[1].4@211.752,213.076 211.752,214.339 211.407,214.684 ; R7.2@213.885,216.07 213.826,216.129 212.852,216.129 211.407,214.684
FLASH_CSN: R18.1 U1.25 U2.1 U2[2].1 | length 31.2
  Top w0.127: U2[2].1@242.465,232.715 U2.1@243.389,232.715 ; v1(261.849,234.594) 262.789,234.594 263.069,234.315 263.482,234.315 267.147,230.65 267.147,228.93 U1.25@267.17,228.907
  Top w0.254: R18.1@240.944,232.716 242.464,232.716 U2[2].1@242.465,232.715 ; U2.1@243.389,232.715 243.415,232.689 v1(244.805,232.689)
  Bottom w0.127: v1(244.805,232.689) 245.811,231.684 253.266,231.684 255.644,234.061 261.137,234.061 261.671,234.594 v1(261.849,234.594)
FLASH_MISO: U1.26 U2.2 U2[2].2 | length 28.6
  Top w0.127: U2[2].2@242.465,231.445 U2.2@243.389,231.445 ; v1(262.661,234.061) 263.377,234.061 266.77,230.668 U1.26@266.77,228.907
  Top w0.254: U2.2@243.389,231.445 v1(244.78,231.445)
  Bottom w0.127: v1(244.78,231.445) 244.795,231.43 253.372,231.43 255.749,233.807 261.365,233.807 261.619,234.061 v1(262.661,234.061)
FLASH_MOSI: U1.27 U2.5 U2[2].5 | length 22.9
  Top w0.127: U2.5@248.659,228.905 U2[2].5@249.635,228.905 ; v1(261.798,233.578) 263.5,233.578 266.37,230.709 U1.27@266.37,228.907
  Top w0.254: U2[2].5@249.635,228.905 v1(250.876,228.905)
  Bottom w0.127: v1(250.876,228.905) 250.876,229.337 252.714,231.176 253.477,231.176 255.854,233.553 261.772,233.553 v1(261.798,233.578)
FLASH_SCLK: U1.21 U2.6 U2[2].6 | length 26.8
  Top w0.127: U2.6@248.659,230.175 U2[2].6@249.635,230.175 250.636,230.175 251.841,231.38 v1(251.841,232.258) ; v1(265.582,234.213) 265.582,233.655 268.77,230.467 U1.21@268.77,228.907
  Bottom w0.127: v1(251.841,232.258) 251.841,232.156 252.059,231.938 253.161,231.938 255.539,234.315 260.756,234.315 261.503,235.062 262.701,235.062 263.336,234.427 265.369,234.427 v1(265.582,234.213)